# Altium PCB Tigershark 3D R2.2.PcbDoc (part 4 of 4)
Units mil, origin at the board's own origin, x right, y up, seen from the top; angles counter-clockwise.
Board outline 4100 x 4050 mil, 4 copper layers (Top Layer, Groun Plane, Power Plane, Bottom Layer), stack 61.73 mil thick; 359 components, 238 nets, 1141 pads, 830 vias.
Unrouted connection lines stored in the file: 3.
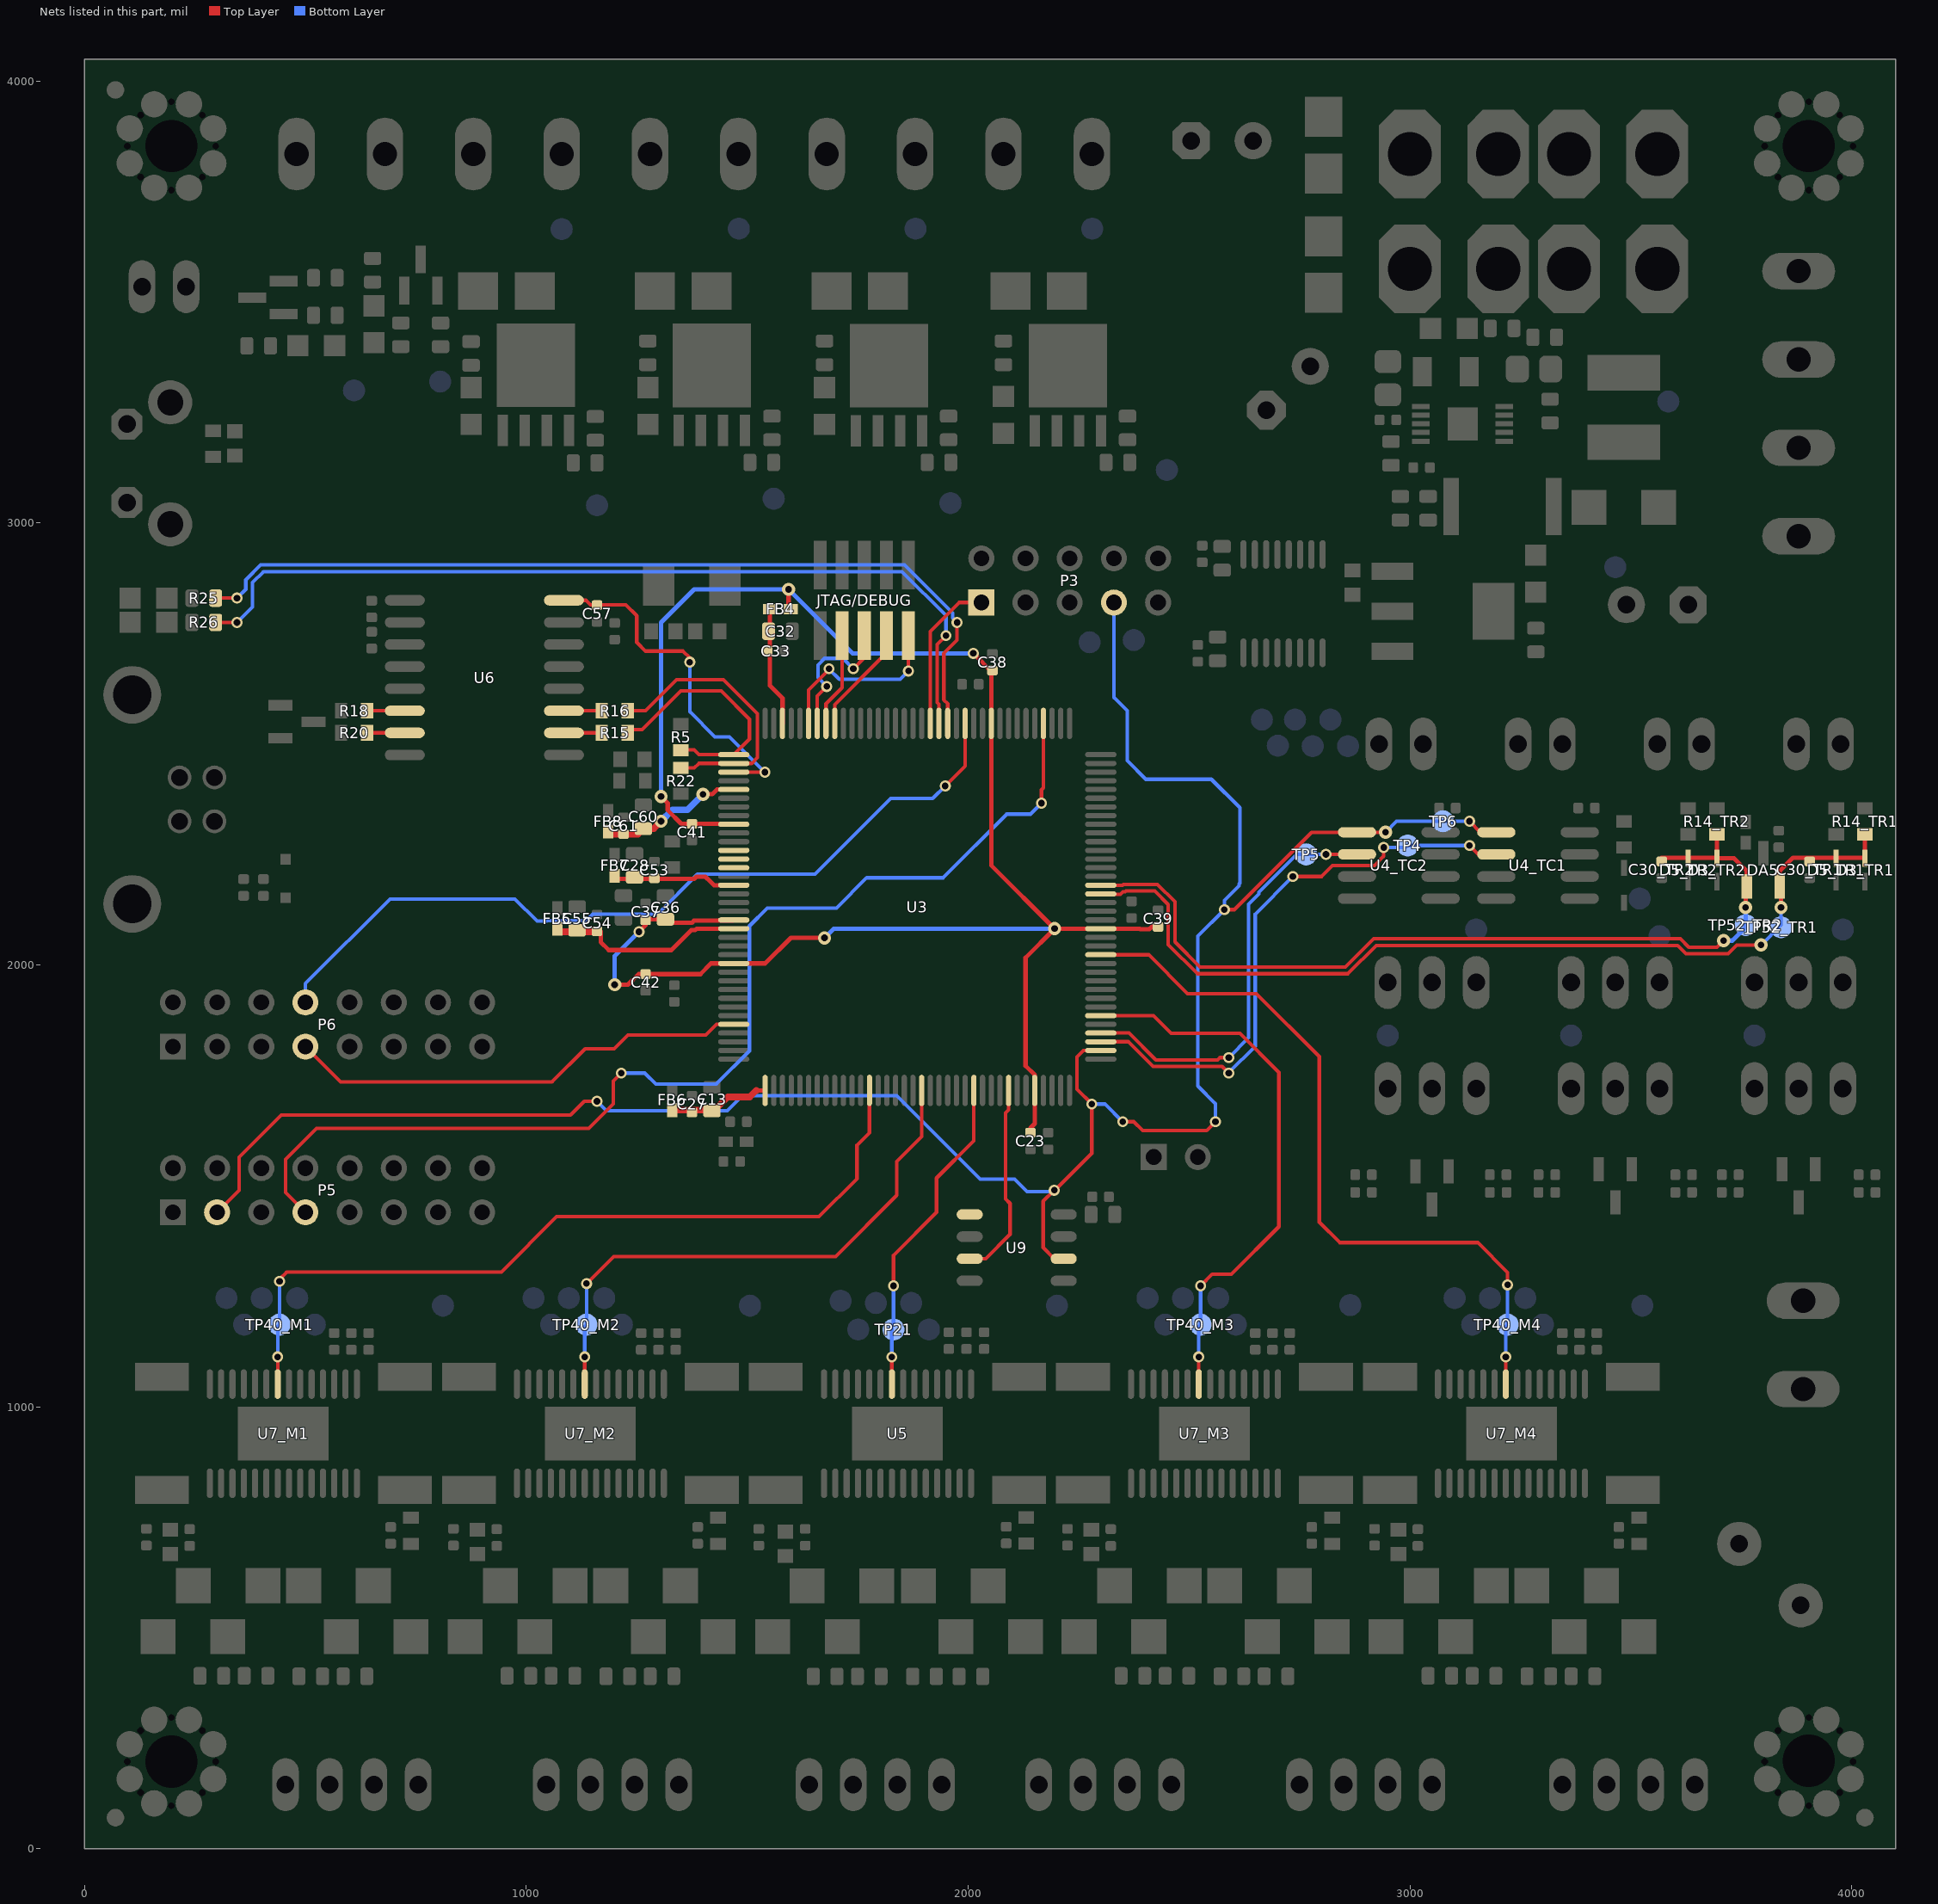
[diagram p6: the nets of this part, all layers, seen from the top]

## Via types
v1: diameter 30, hole 15, Top Layer to Bottom Layer, tented both sides, 528 vias
v2: diameter 25, hole 15, Top Layer to Bottom Layer, tented both sides, 154 vias
v3: diameter 19.68, hole 7.87, Top Layer to Bottom Layer, 75 vias
v4: diameter 25, hole 15, Top Layer to Bottom Layer, 61 vias
v5: diameter 30, hole 15, Top Layer to Bottom Layer, 9 vias
v6: diameter 45, hole 20, Top Layer to Bottom Layer, tented both sides, 2 vias
v7: diameter 25, hole 15, Top Layer to Bottom Layer, tented bottom, 1 vias

## Nets (pads, with @x,y where several pads share a name; then routed paths per layer and width w, separated by ;. In a path a pad name is that pad's centre, name@x,y a point inside that pad or via, vN(x,y) a via of type N, cw(c..) or ccw(c..) an arc to the next point about the centre after c; other vN are vias at no path point) (continued)
SCLK: P3.7 P5.3 TP6.1 U3.110 U4_TC1.5 U4_TC2.5 U9.6 | length 5223.4
  Top Layer w8: P5.3@300,1440 350,1490 350,1565 445,1660 1100,1660 1131.21,1691.21 v2(1160,1691.21) ; U9.6@2216.3,1335 2195,1335 2170,1360 2170,1465 v2(2195,1490) 2196.21,1490 2280,1573.79 v2(2280,1685) 2246.39,1718.61 2246.39,1791.39 2261.3,1806.3 U3.110@2300.35,1806.3 ; v2(2350,1645) 2375,1645 2395,1625 2540,1625 v2(2560,1645) ; v2(2580,2125) 2602.43,2125 2777.43,2300 U4_TC2.5@2880.51,2300 v1(2945,2300) ; v2(3135,2325) 3160,2300 U4_TC1.5@3195.51,2300
  Bottom Layer w8: v2(1160,1691.21) 1181.21,1670 1454.85,1670 1488.85,1704 1838.57,1704 2027.57,1515 2105,1515 2133.5,1486.5 2191.5,1486.5 v2(2195,1490) ; v2(2280,1685) 2310,1685 v2(2350,1645) ; P3.7@2330,2820 2330,2605 2360,2575 2360,2462.43 2402.43,2420 2550.66,2420 2615,2355.66 2615,2184.85 2613.5,2183.35 2613.5,2179.2 2580,2145.7 v2(2580,2125) 2520,2065 2520,1725.81 2560,1685.81 v2(2560,1645) ; v1(2945,2300) 2970,2325 v2(3135,2325)
SHDN: U3.50
SPIFLASH_CS: U9.1
STEP1: TP40_M1.1 U3.85 U7_M1.22 | length 1843.3
  Top Layer w8: U7_M1.22@437.2,1052.2 v2(437.2,1112.64) ; v2(441.26,1283.74) 441.26,1288.69 457.57,1305 943.64,1305 1068.64,1430 1662.43,1430 1748.5,1516.07 1748.5,1591.99 1776.73,1620.22 U3.85@1776.73,1715.75
  Bottom Layer w8: v2@437,1112.84 v2(437.2,1112.64) 437.2,1181.75 TP40_M1.1@441.23,1185.77 v2@441.23,1275.77
STEP2: TP40_M2.1 U3.91 U7_M2.22 | length 1271.1
  Top Layer w8: U7_M2.22@1132.2,1052.2 v2(1132.2,1112.64) ; v2(1136.26,1278.74) 1197.52,1340 1700,1340 1838.5,1478.5 1838.5,1554.71 1894.84,1611.06 U3.91@1894.84,1715.75
  Bottom Layer w8: v2@1132,1112.84 v2(1132.2,1112.64) 1132.2,1181.75 TP40_M2.1@1136.23,1185.77 v2@1136.23,1275.77
STEP3: TP40_M3.1 U3.114 U7_M3.22 | length 1265.3
  Top Layer w8: U3.114@2301.42,1886.1 U3.114@2300.35,1885.04 2419.41,1885.04 2459.45,1845 2615.29,1845 2703.5,1756.79 2703.5,1407.43 2596.07,1300 2552.52,1300 v4(2526.26,1273.74) ; U7_M3.22@2522.2,1052.2 v4(2522.2,1112.64)
  Bottom Layer w8: v4@2522,1112.84 v4(2522.2,1112.64) 2522.2,1181.75 TP40_M3.1@2526.23,1185.77 v4@2526.23,1275.77
STEP4: TP40_M4.1 U3.121 U7_M4.22 | length 1691.9
  Top Layer w8: U3.121@2300.35,2022.83 2408.89,2022.83 2496.73,1935 2652.57,1935 2795,1792.57 2795,1417.57 2841.07,1371.5 3153.5,1371.5 3221.23,1303.77 v4(3221.23,1275.77) ; U7_M4.22@3217.2,1052.2 v4(3217.2,1112.64)
  Bottom Layer w8: v4@3217,1112.84 v4(3217.2,1112.64) 3217.2,1181.75 TP40_M4.1@3221.23,1185.77 v4(3221.23,1275.77)
STEP_EXP1: P6.7 U3.68 | length 1056.8
  Top Layer w8: P6.7@500,1815 580,1735 1058.13,1735 1133.13,1810 1198.79,1810 1229.77,1840.98 1405.98,1840.98 1430.35,1865.35 U3.68@1469.65,1865.35
STEP_EXP2: P6.8 U3.13 | length 1877.7
  Top Layer w8: v2(1948.23,2405) 1993.27,2450.03 U3.13@1993.27,2546.46
  Bottom Layer w8: P6.8@500,1915 500,1957.57 691.43,2149 974.23,2149 1024.23,2099 1045.77,2099 1046.77,2100 1135,2100 1150,2115 1290.27,2115 1291.77,2116.5 1298.78,2116.5 1387.28,2205 1653.64,2205 1825.14,2376.5 1919.73,2376.5 v2(1948.23,2405)
STEP_Z: TP21.1 U3.97 U5.22 | length 740.5
  Top Layer w8: U5.22@1827.24,1052.17 v4(1827.24,1112.61) ; v4(1831.26,1273.74) 1831.26,1342.47 1928.5,1439.71 1928.5,1517.43 2012.95,1601.89 U3.97@2012.95,1715.75
  Bottom Layer w8: v4(1827.24,1112.61) 1827.24,1181.72 1831.26,1185.74 v4(1831.26,1273.74)
TC_CS1: TP4.1 U3.111 U4_TC1.6 | length 1333.4
  Top Layer w8: U3.111@2300.35,1825.98 2362.8,1825.98 2418.79,1770 2575,1770 v2(2590,1755) ; v2(2735,2200) 2800,2200 2825,2225 2920,2225 2940.79,2245.79 v2(2940.79,2265.5) ; v2(3135,2270) 3155,2250 U4_TC1.6@3195.51,2250
  Bottom Layer w8: v2(2590,1755) 2590,1756.21 2650,1816.21 2650,2115 v2(2735,2200) ; v2(2940.79,2265.5) 2990.5,2265.5 TP4.1@2995,2270 v2(3135,2270)
TC_CS2: TP5.1 U3.112 U4_TC2.6 | length 977.6
  Top Layer w8: U3.112@2300.35,1845.67 2364.33,1845.67 2425,1785 2565,1785 2570,1790 v2(2590,1790) ; v2@2811.77,2255 2816.77,2250 U4_TC2.6@2880.51,2250
  Bottom Layer w8: v2(2590,1790) 2635,1835 2635,2137.06 2658.5,2160.56 2658.5,2164.71 2743.79,2250 v2(2810,2250)
TCK/SWDCLK: JTAG/DEBUG.4 U3.28 | length 247.1
  Top Layer w8: U3.28@1697.99,2546.46 1697.99,2589.12 1815,2706.13 JTAG/DEBUG.4@1815,2745.08
TDI: JTAG/DEBUG.8 U3.29 | length 213.8
  Top Layer w8: U3.29@1678.31,2546.46 1678.31,2590.65 1715,2627.34 JTAG/DEBUG.8@1715,2745.08
TDO/SWO: JTAG/DEBUG.6 U3.30 | length 330.4
  Top Layer w8: U3.30@1658.62,2546.46 1658.62,2608.62 v2(1680,2630) ; v2(1740,2670) 1765,2695 JTAG/DEBUG.6@1765,2745.08
  Bottom Layer w8: v2(1680,2630) 1660,2650 1660,2678.23 1675.27,2693.5 1716.5,2693.5 v2(1740,2670)
THERM_AN1: C30_TR1.2 D3_TR1.1 D5_TR1.2 DA5.2 R14_TR1.1 TP52_TR1.1 U3.128 | length 2106.8
  Top Layer w8: U3.128@2300.35,2160.63 2301.35,2159.63 2344.63,2159.63 2350.32,2165.32 2355.64,2165.32 2357.52,2167.2 2422.48,2167.2 2453,2136.68 2453,2045.79 2518.79,1980 2860,1980 2924,2044 3606,2044 3625,2025 3720,2025 3740,2045 v1(3795,2045)
  Top Layer w10: v1(3840,2130) 3840,2175 DA5.2@3837.4,2177.6 3837.4,2212.4 3867.56,2242.56 D3_TR1.1@4029.02,2242.56 ; D3_TR1.1@4030,2241.57 R14_TR1.1@4030,2295.47
  Bottom Layer w8: v1(3795,2045) 3840,2090 v1@3840,2120
THERM_AN2: C30_TR2.2 D3_TR2.1 D5_TR2.2 DA5.1 R14_TR2.1 TP52_TR2.1 U3.129 | length 2020.3
  Top Layer w8: U3.129@2300.35,2180.32 2349.42,2180.32 2351.31,2182.2 2428.69,2182.2 2468,2142.89 2468,2052 2525,1995 2853.79,1995 2917.79,2059 3612.21,2059 3631.21,2040 3695,2040 v1(3710,2055)
  Top Layer w10: C30_TR2.2@3570,2242.56 D3_TR2.1@3694.02,2242.56 ; R14_TR2.1@3695,2295.47 D3_TR2.1@3695,2241.57 3733.43,2241.57 3762.6,2212.4 DA5.1@3762.6,2177.6 3760,2175 v1(3760,2130)
  Bottom Layer w10: v1(3710,2055) 3730,2055 3760,2085 v1@3760,2120
TMS/SWDIO: JTAG/DEBUG.2 U3.31 | length 394.6
  Top Layer w8: U3.31@1638.94,2546.46 1638.94,2622.17 v2@1685.88,2669.12 ; v2(1865,2665) JTAG/DEBUG.2@1865,2720.08
  Bottom Layer w8: v2(1685,2670) 1708.5,2646.5 1846.5,2646.5 v2(1865,2665)
TXD0: P5.7 U3.4 | length 2582.4
  Top Layer w8: P5.7@500,1440 455,1485 455,1560 525,1630 1141.36,1630 1197,1685.64 1197,1737 v2(1215,1755) ; v2(2166.1,2366.1) 2166.1,2396.1 2170.43,2400.43 U3.4@2170.43,2546.46
  Bottom Layer w8: v2(1215,1755) 1268.23,1755 1293.23,1730 1430,1730 1505,1805 1505,2087.98 1545.52,2128.5 1702.14,2128.5 1770.74,2197.1 1943.32,2197.1 2087.32,2341.1 2141.1,2341.1 v2(2166.1,2366.1)
TXD1: P3.1 U3.17 | length 350.7
  Top Layer w8: U3.17@1914.53,2546.46 1914.53,2754.53 1980,2820 P3.1@2030,2820
UD_N: R18.1 U6.6 | length 85.4
  Top Layer w8: R18.1@639.53,2575 U6.6@724.88,2575
UD_P: R20.1 U6.7 | length 85.4
  Top Layer w8: R20.1@639.53,2525 U6.7@724.88,2525
UI_N: R16.2 U6.11 | length 85.4
  Top Layer w8: U6.11@1085.12,2575 1135,2575 R16.2@1170.47,2575
UI_P: R15.2 U6.10 | length 85.4
  Top Layer w8: U6.10@1085.12,2525 1150,2525 R15.2@1170.47,2525
UMCU_N: R16.1 R22.1 U3.38 | length 631.4
  Top Layer w8: R16.1@1229.53,2575 1269.64,2575 1339.64,2645 1441.56,2645 1446.51,2645 1523,2568.51 1523,2468.91 1510,2455.91 U3.38@1469.65,2455.91 1390.28,2455.91 1380,2445.63 R22.1@1355,2445.63
UMCU_P: R5.1 R15.1 U3.37 | length 555.6
  Top Layer w8: R15.1@1229.53,2525 1237.03,2532.5 1262.5,2532.5 1350,2620 1441.1,2620 1505,2556.1 1505,2510.94 U3.37@1469.65,2475.59 1390.98,2475.59 1380,2486.57 R5.1@1355,2486.57
USB_RX: R25.1 U3.15 | length 2026.8
  Top Layer w8: R25.1@296.77,2830 v2(345,2830) ; U3.15@1953.9,2546.46 1953.9,2591.1 1945,2600 1945,2705 1975,2735 v2(1975,2775)
  Bottom Layer w8: v2(345,2830) 365,2850 365,2871.21 398.79,2905 1856.21,2905 1965,2796.21 1965,2785 v2(1975,2775)
USB_TX: R26.1 U3.16 | length 2028.1
  Top Layer w8: R26.1@296.77,2775 v2(345,2775) ; U3.16@1934.21,2546.46 1934.21,2589.57 1930,2593.79 1930,2725 v2(1950,2745)
  Bottom Layer w8: v2(345,2775) 380,2810 380,2865 405,2890 635,2890 1850,2890 1950,2790 v2(1950,2745)
VBUS: C57.2 U3.39 U6.16 | length 793
  Top Layer w8: U6.16@1085.12,2825 1135,2825 1145,2815 1225,2815 1250,2790 1250,2730 1270,2710 1355,2710 1370,2695 v2(1370,2685) ; U3.39@1469.65,2436.22 v2@1540,2436.22
  Bottom Layer w8: v2(1370,2685) 1370,2572.87 1426.77,2516.1 1460,2516.1 v2(1540,2436.1)
VDDANA: C13.2 C27.2 FB6.2 U3.73 | length 228.3
  Top Layer w10: 1520.75,1715.75 U3.73@1539.79,1715.75
  Top Layer w15: FB6.2@1330,1671.1 1426.1,1671.1 1456.1,1701.1 1506.1,1701.1 1520.75,1715.75
VDDBU: C28.2 C53.2 FB7.2 U3.52 | length 282.5
  Top Layer w10: FB7.2@1200,2201.38 1206.88,2194.5 1379.85,2194.5 1384.85,2199.5 1405.15,2199.5 1410.15,2194.5 1410.5,2194.5 1424.68,2180.32 U3.52@1469.65,2180.32
VDDIN: C54.2 C55.2 FB5.2 U3.57 | length 441.4
  Top Layer w8: C54.2@1167.77,2078.23 C54.2@1170,2076
  Top Layer w10: C54.2@1168.37,2075 1168.37,2051.63 1186.5,2033.5 1328.5,2033.5 1373.5,2078.5 1382.19,2078.5 1385.58,2081.89 U3.57@1469.65,2081.89
  Top Layer w15: FB5.2@1070,2081.38 1076.38,2075 C54.2@1153.37,2075
VDDOUT: C23.2 C36.2 C37.2 C38.2 C39.2 C41.2 C42.2 FB4.1 U3.10 U3.45 U3.56 U3.61 U3.104 U3.124 | length 4296.6
  Top Layer w10: v1(1200,1955) 1230,1955 1254,1979 1394,1979 1418.15,2003.15 U3.61@1469.65,2003.15 1540.78,2003.15 1598.73,2061.1 v1(1675,2061.1) ; v2(1255,2075) C37.2@1270,2090 ; C37.2@1270,2098.54 C37.2@1270,2101 1272.23,2103.23 C36.2@1315,2103.23 1322.73,2095.5 1375.15,2095.5 1379.44,2099.8 1467.87,2099.8 U3.56@1469.65,2101.57 ; v1(1305,2381.1) 1320,2366.1 1320,2350 1351,2319 1468.76,2319 U3.45@1469.65,2318.11 ; FB4.1@1593.62,2811.1 v1(1593.62,2849.72) ; v2(2011.58,2705) 2055,2661.58 2052.32,2658.9 U3.10@2052.32,2546.46 2052.32,2225.35 v1(2195.79,2081.89) ; C23.2@2141.1,1620.1 2141.1,1631.1 2150.75,1640.75 U3.104@2150.75,1715.75 2150.75,1750.91 2130,1771.66 2130,2016.1 v1(2195.79,2081.89) ; C39.2@2435,2086 2415.65,2086 2410.15,2080.5 2389.85,2080.5 2388.46,2081.89 U3.124@2300.35,2081.89 v1(2195.79,2081.89)
  Bottom Layer w10: v1(1200,1955) 1200,2020 v2(1255,2075) ; v1(1305,2381.1) 1305,2775 1379.72,2849.72 v1(1593.62,2849.72) 1738.35,2705 v2(2011.58,2705) ; v1(1675,2061.1) 1695.79,2081.89 v1(2195.79,2081.89)
VDDPLL: C32.2 C33.2 FB4.2 U3.34 | length 278.5
  Top Layer w10: FB4.2@1546.38,2811.1 1551.38,2806.1 1551.38,2632.14 1579.88,2603.63 U3.34@1579.88,2546.46
VDDUTMI: C60.2 C61.2 FB8.2 U3.41 | length 328.6
  Top Layer w10: v1(1400,2386.1) 1421.1,2386.1 1431.85,2396.85 U3.41@1469.65,2396.85
  Top Layer w15: FB8.2@1185,2301.38 1190.38,2296 C61.2@1220,2296 1252.77,2296 C60.2@1265,2308.23 1288.23,2308.23 v1(1305,2325)
  Bottom Layer w15: v1(1305,2325) 1331.1,2351.1 1365,2351.1 v1(1400,2386.1)
WP#: U3.101 U9.3 | length 446.7
  Top Layer w8: U9.3@2003.7,1335 2040,1335 2095,1390 2095,1460 2085,1470 2085,1665 2091.69,1671.69 U3.101@2091.69,1715.75
XIN32: U3.48
XOUT32: U3.49
pads on no net: FD1.1 FD2.1 FD3.1 H1.0 H2.0 H3.0 H4.0 JTAG/DEBUG.7 U3.1 U3.2 U3.5 U3.6 U3.7 U3.8 U3.32 U3.127 U3.134 U3.135 U3.138 U3.140 U3.141 U3.142 U3.143 U4_TC1.8 U4_TC2.8 U5.18 U5.19 U5.23 U5.27 U7_M1.18 U7_M1.19 U7_M1.23 U7_M1.27 U7_M2.18 U7_M2.19 U7_M2.23 U7_M2.27 U7_M3.18 U7_M3.19 U7_M3.23 U7_M3.27 U7_M4.18 U7_M4.19 U7_M4.23 U7_M4.27

## Polygon pours and split planes (outlines as drawn)
GND on Top Layer "Mechanical 15-No Net" (solid, remove dead copper, pour order 56): 2885,1375 2885,855 3025,855 3025,875 3185,875 3390,875 3390,785 3405,770 3465,710 3495,710 3495,775 3440,775 3440,850 3575,850 3575,1375 3325,1375 3325,1150 3440,1150 3440,1005 3265,1005 3080,1005 3080,1040 3080,1375
GND on Top Layer "Mechanical 15-No Net" (solid, remove dead copper, pour order 56): 2190,1375 2190,855 2330,855 2330,875 2490,875 2695,875 2695,785 2710,770 2770,710 2800,710 2800,775 2745,775 2745,850 2880,850 2880,1375 2630,1375 2630,1150 2745,1150 2745,1005 2570,1005 2385,1005 2385,1040 2385,1375
GND on Top Layer "Mechanical 15-No Net" (solid, remove dead copper, pour order 56): 1495.26,1375 1495.26,855 1635.26,855 1635.26,875 1795.26,875 2000.26,875 2000.26,785 2015.26,770 2075.26,710 2105.26,710 2105.26,775 2050.26,775 2050.26,850 2185.26,850 2185.26,1375 1935.26,1375 1935.26,1150 2050.26,1150 2050.26,1005 1875.26,1005 1690.26,1005 1690.26,1040 1690.26,1375
GND on Top Layer "Mechanical 15-No Net" (solid, remove dead copper, pour order 56): 800,1375 800,855 940,855 940,875 1100,875 1305,875 1305,785 1320,770 1380,710 1410,710 1410,775 1355,775 1355,850 1490,850 1490,1375 1240,1375 1240,1150 1355,1150 1355,1005 1180,1005 995,1005 995,1040 995,1375
GND on Top Layer "Mechanical 15-No Net" (solid, remove dead copper, pour order 56): 105,1375 105,855 245,855 245,875 405,875 610,875 610,785 625,770 685,710 715,710 715,775 660,775 660,850 795,850 795,1375 545,1375 545,1150 660,1150 660,1005 485,1005 300,1005 300,1040 300,1375
GND on Top Layer "Top Layer-No Net" (solid, remove dead copper, pour order 62): 3805,1090 3805,925 3830,925 3830,905 3830,810 3830,350 4080,350 4080,1090
+12VCC1 on Top Layer "Top Layer-No Net" (solid, remove dead copper, pour order 54): 4080,1365 3585,1365 3585,350 3810,350 3815,350 3820,350 3820,915 3795,915 3795,1100 4080,1100
NetD18_C on Top Layer "Mechanical 15-No Net" (solid, remove dead copper, pour order 65): 2055,3175 2125,3175 2125,3255 2130,3260 2235,3260 2620,3260 2620,4025 2155,4025 2155,3475 2125,3475 2125,3395 2125,3285 2110,3285 2110,3255 2055,3255
GND on Top Layer "Mechanical 15-No Net" (solid, remove dead copper, pour order 67): 1994.5,3164.19 1994.5,3064.19 1999.5,3059.19 2309.5,3059.19 2309.5,3124.19 2269.5,3124.19 2269.5,3249.19 2129.5,3249.19 2129.5,3164.19
GND on Top Layer "Mechanical 15-No Net" (solid, remove dead copper, pour order 68): 1589.5,3164.19 1589.5,3064.19 1594.5,3059.19 1904.5,3059.19 1904.5,3124.19 1864.5,3124.19 1864.5,3249.19 1724.5,3249.19 1724.5,3164.19
GND on Top Layer "Mechanical 15-No Net" (solid, remove dead copper, pour order 69): 1188.5,3164.61 1188.5,3064.61 1193.5,3059.61 1503.5,3059.61 1503.5,3124.61 1463.5,3124.61 1463.5,3249.61 1323.5,3249.61 1323.5,3164.61
GND on Top Layer "Mechanical 15-No Net" (solid, remove dead copper, pour order 70): 790,3165 790,3065 795,3060 1105,3060 1105,3125 1065,3125 1065,3250 925,3250 925,3165
GND on Top Layer "SMPS" (solid, pour order 66): 3242,3173 3214,3145 3126,3145 3076,3095 3076,2972 3201,2972 3250,3021 3252,3023 3252,3156 3252,3173
NetC40_2 on Top Layer "SMPS" (solid, pour order 55): 3256,3239 3278.77,3216.23 3323,3216.23 3429.23,3110 3445,3110 3461,3094 3461,3018 3499,2980 3585,2980 3603,2998 3603,3080 3603,3193 3557,3239 3546,3250 3274,3250 3259,3250 3256,3247
NetD2_A on Top Layer "SMPS" (solid, pour order 53): 3259,3206 3259,3070 3259,3021 3308,2972 3421,2972 3445,2996 3445,3085 3433,3097 3416,3097 3335,3178 3308,3205 3262,3205
NetF2_1 on Top Layer "Mechanical 15-No Net" (solid, remove dead copper, pour order 72): 4075,3450 3730,3450 3730,3695 3725,3700 3350,3700 3280,3700 3280,4025 4075,4025
NetF1_1 on Top Layer "Mechanical 15-No Net" (solid, remove dead copper, pour order 73): 3730,3085 4075,3085 4075,3310 4075,3435 4065,3435 4065,3300 4065,3435 3865,3435 3865,3300 3865,3435 3785,3435 3785,3300 3785,3435 3730,3435 3715,3435 3715,3690 3280,3690 3280,3455 3285,3450 3395,3450 3395,3400 3555,3400 3605,3400 3610,3395 3610,3085
+12VCC2 on Top Layer "Mechanical 15-No Net" (solid, remove dead copper, pour order 74): 3275,3470 3275,3685 3280,3690 2880,3690 2880,3595 2740,3595 2740,3470 2740,3400 2725,3385 2725,3325 2725,3155 2730,3150 2875,3150 2875,3425 3015,3425 3015,3475 3265,3475
+12VCC3 on Top Layer "Mechanical 15-No Net" (solid, remove dead copper, pour order 75): 3270,3700 3270,4025 2630,4025 2630,3915 2630,3810 2750,3810 2750,3855 2755,3850 2865,3850 2865,3735 2930,3735 2865,3735 2865,3700 2965,3700
3.3VCC on Top Layer "Mechanical 15-No Net" (solid, remove dead copper, pour order 77): 2900,2750 2900,2655 3540,2655 3540,2875 3320,2875 3315,2870 3315,2735 3315,2725 3120,2725 3120,2750
+5VCC on Top Layer "Mechanical 15-No Net" (solid, remove dead copper, pour order 78): 2840,3010 2840,2870 3015,2870 3015,2920 2935,2920 2935,3010
+12VCC2 on Top Layer "Mechanical 15-No Net" (solid, remove dead copper, pour order 63): 1600,4025 1600,3400 1720,3400 1720,3480 1745,3480 1745,4025
+12VCC2 on Top Layer "Mechanical 15-No Net" (solid, remove dead copper, pour order 61): 1200,4025 1200,3400 1320,3400 1320,3480 1345,3480 1345,4025
NetD16_C on Top Layer "Mechanical 15-No Net" (solid, remove dead copper, pour order 81): 1645,3280 1645,3195 1720,3195 1720,3255 1780,3255 1920,3255 1920,3265 1995,3265 1995,4030 1750,4030 1750,3475 1725,3475 1725,3395 1725,3335 1705,3335 1705,3280
NetD14_C on Top Layer "Mechanical 15-No Net" (solid, remove dead copper, pour order 80): 1245,3280 1245,3195 1320,3195 1320,3255 1380,3255 1520,3255 1520,3265 1595,3265 1595,4030 1350,4030 1350,3475 1325,3475 1325,3395 1325,3335 1305,3335 1305,3280
NetD12_1 on Top Layer "Mechanical 15-No Net" (solid, remove dead copper, pour order 79): 845,3280 845,3195 920,3195 920,3255 980,3255 1120,3255 1120,3265 1195,3265 1195,4030 950,4030 950,3475 925,3475 925,3395 925,3335 905,3335 905,3280
GND on Top Layer "Mechanical 15-No Net" (solid, remove dead copper, pour order 82): 2740,3605 2875,3605 2875,3685 2880,3690 2860,3690 2860,3845 2855,3840 2760,3840 2760,3810 2760,3805 2625,3805 2625,3255 2390,3255 2390,3150 2680,3150 2720,3150 2720,3380 2720,3605
GND on Top Layer "Mechanical 15-No Net" (solid, remove dead copper, pour order 83): 2840,2860 2840,2655 2845,2650 2895,2650 2895,2755 2980,2755 3125,2755 3125,2730 3250,2730 3250,2875 3250,2880 3255,2875 3320,2875 3325,2880 3330,2880 3545,2880 3545,2660 4080,2660 4080,3080 3745,3080 3740,3075 3610,3075 3610,2975 3595,2960 3270,2960 3065,2960 3030,2925 3025,2920 3025,2860
+12VCC2 on Top Layer "Mechanical 15-No Net" (solid, remove dead copper, pour order 84): 825,4030 825,3685 840,3685 840,3480 855,3480 855,3395 915,3395 915,3480 945,3480 945,3760 945,4030
GND on Top Layer "Mechanical 15-No Net" (solid, remove dead copper, pour order 85): 790,3435 830,3435 830,3675 820,3675 820,3775 725,3775 725,3695 785,3635 785,3630 785,3435
GND on Top Layer "Mechanical 15-No Net" (solid, remove dead copper, pour order 86): 545,3530 545,3580 600,3580 600,3625 332.07,3625 330,3625 330,3620 330,3575 370,3535 375,3530 490,3530
+12VCC3 on Top Layer "Mechanical 15-No Net" (solid, remove dead copper, pour order 64): 2000,4025 2000,3400 2120,3400 2120,3480 2145,3480 2145,4025
GND on Bottom Layer "Mechanical 15-No Net" (solid, remove dead copper, pour order 48): 2886.31,1375 3025,1375 3575,1375 3575,1225 3575,700 3540,700 2885,700 2885,1360 2885,1375
GND on Bottom Layer "Mechanical 15-No Net" (solid, remove dead copper, pour order 48): 2191.31,1375 2330,1375 2880,1375 2880,1225 2880,700 2845,700 2190,700 2190,1360 2190,1375
GND on Bottom Layer "Mechanical 15-No Net" (solid, remove dead copper, pour order 48): 1496.57,1375 1635.26,1375 2185.26,1375 2185.26,1225 2185.26,700 2150.26,700 1495.26,700 1495.26,1360 1495.26,1375
GND on Bottom Layer "Mechanical 15-No Net" (solid, remove dead copper, pour order 48): 801.31,1375 940,1375 1490,1375 1490,1225 1490,700 1455,700 800,700 800,1360 800,1375
GND on Bottom Layer "Mechanical 15-No Net" (solid, remove dead copper, pour order 48): 106.31,1375 245,1375 795,1375 795,1225 795,700 760,700 105,700 105,1360 105,1375
+12VCC1 on Bottom Layer "Mechanical 15-No Net" (solid, remove dead copper, pour order 52): 4080,1360 3585,1360 3585,690 3560,690 20,690 20,325 195,325 200,330 375,330 4080,330
+12VCC3 on Bottom Layer "Mechanical 15-No Net" (solid, remove dead copper, pour order 76): 3270,3700 3270,3955 2000,3955 2000,3700 2000,3600 2390,3600 2390,3700
NetF2_1 on Bottom Layer "Mechanical 15-No Net" (solid, remove dead copper, pour order 71): 4075,3450 3730,3450 3730,3695 3725,3700 3350,3700 3280,3700 3280,4025 4075,4025
NetF1_1 on Bottom Layer "Mechanical 15-No Net" (solid, remove dead copper, pour order 87): 3280,3480 3280,3495 3280,3680 3290,3690 3310,3690 3715,3690 3715,3675 3715,3435 3785,3435 3785,3300 3785,3435 4080,3435 4080,3300 4080,3085 3940,3085 3610,3085 3610,3395 3605,3400 3395,3400 3395,3465 3360,3465 3280,3465
NetD16_C on Bottom Layer "Mechanical 15-No Net" (solid, remove dead copper, pour order 90): 1725,3335 1725,3475 1750,3475 1750,3525 1750,4030 1825,4030 1995,4030 1995,3950 1990,3945 1995,3940 1995,3265 1725,3265
NetD14_C on Bottom Layer "Mechanical 15-No Net" (solid, remove dead copper, pour order 89): 1325,3335 1325,3475 1350,3475 1350,3525 1350,4030 1425,4030 1595,4030 1595,3950 1590,3945 1595,3940 1595,3265 1325,3265
NetD12_1 on Bottom Layer "Mechanical 15-No Net" (solid, remove dead copper, pour order 88): 925,3335 925,3475 950,3475 950,3525 950,4030 1025,4030 1195,4030 1195,3950 1190,3945 1195,3940 1195,3265 925,3265
+12VCC2 on Bottom Layer "Mechanical 15-No Net" (solid, remove dead copper, pour order 91): 355,4015 355,3685 20,3685 20,3395 770,3395 780,3385 780,3030 2870,3030 2870,3470 2870,3480 2970,3480 3270,3480 3275,3485 3275,3690 2405,3690 2405,3590 2005,3590 2005,3255 1970,3255 1715,3255 1715,3485 1745,3485 1745,4025 1740,4030 1600,4030 1600,3255 1315,3255 1315,3480 1345,3480 1345,4030 1200,4030 1200,3255 920,3255 920,3480 945,3480 945,4030 355,4030
GND on Bottom Layer "Mechanical 15-No Net" (solid, remove dead copper, pour order 92): 4100,2660 4100,3075 3950,3075 3605,3075 3600,3080 3600,3385 3590,3395 3550,3395 3385,3395 3385,3445 3385,3455 3270,3455 3270,3475 3170,3475 2880,3475 2880,3030 2880,3025 2840,3025 2845,3020 2845,2660
INPUT_GND on Groun Plane (split plane): 899.9,2435.1 530,2435.1 528.05,2434.71 526.4,2433.6 511.4,2418.6 510.29,2416.95 509.9,2415 509.9,2142.11 437.89,2070.1 220,2070.1 218.05,2069.71 216.4,2068.6 202.89,2055.1 20.1,2055.1 20.1,2699.9 385,2699.9 386.95,2700.29 388.6,2701.4 404.85,2717.65 405.96,2719.3 406.35,2721.25 406.35,2851.25 406.35,2854.14 417.11,2864.9 899.9,2864.9
GND on Groun Plane (split plane): 4079.9,20.1 20.1,20.1 20.1,2044.9 205,2044.9 206.95,2045.29 208.6,2046.4 222.11,2059.9 440,2059.9 441.95,2060.29 443.6,2061.4 518.6,2136.4 519.71,2138.05 520.1,2140 520.1,2412.89 532.11,2424.9 905,2424.9 906.95,2425.29 908.6,2426.4 909.71,2428.05 910.1,2430 910.1,2870 909.71,2871.95 908.6,2873.6 906.95,2874.71 905,2875.1 415,2875.1 413.05,2874.71 411.4,2873.6 397.65,2859.85 396.54,2858.2 396.15,2856.25 396.15,2851.25 396.15,2723.36 382.89,2710.1 20.1,2710.1 20.1,4029.9 4079.9,4029.9
NetF2_1 on Power Plane (split plane): 4079.9,3440.1 3720.1,3440.1 3720.1,3695 3719.71,3696.95 3718.6,3698.6 3716.95,3699.71 3715,3700.1 3280.1,3700.1 3280.1,4029.9 4079.9,4029.9
+12VCC3 on Power Plane (split plane): 3269.9,3700.1 2010.1,3700.1 2010.1,4029.9 3269.9,4029.9
NetF1_1 on Power Plane (split plane): 3709.9,3435 3710.29,3433.05 3711.4,3431.4 3713.05,3430.29 3715,3429.9 4079.9,3429.9 4079.9,2875.1 3580.1,2875.1 3580.1,3305 3579.71,3306.95 3578.6,3308.6 3576.95,3309.71 3575,3310.1 3280.1,3310.1 3280.1,3455 3280.1,3689.9 3709.9,3689.9
+5VCC on Power Plane (split plane): 3569.9,2875.1 2837.11,2875.1 2835.1,2877.11 2835.1,3097.89 3037.11,3299.9 3569.9,3299.9
3.3VCC on Power Plane (split plane): 774.9,3025 775.29,3023.05 776.4,3021.4 778.05,3020.29 780,3019.9 2824.9,3019.9 2824.9,2875 2825.29,2873.05 2826.4,2871.4 2831.4,2866.4 2833.05,2865.29 2835,2864.9 4079.9,2864.9 4079.9,1380.1 3510,1380.1 3508.05,1379.71 3506.4,1378.6 3505.29,1376.95 3504.9,1375 3504.9,945.1 20.1,945.1 20.1,3394.9 774.9,3394.9
+12VCC2 on Power Plane (split plane): 1999.9,3695 2000.29,3693.05 2001.4,3691.4 2003.05,3690.29 2005,3689.9 3269.9,3689.9 3269.9,3455 3269.9,3310.1 3035,3310.1 3033.05,3309.71 3031.4,3308.6 2826.4,3103.6 2825.29,3101.95 2824.9,3100 2824.9,3030.1 785.1,3030.1 785.1,3400 784.71,3401.95 783.6,3403.6 781.95,3404.71 780,3405.1 20.1,3405.1 20.1,4029.9 1999.9,4029.9
+12VCC1 on Power Plane (split plane): 4079.9,20.1 20.1,20.1 20.1,934.9 3510,934.9 3511.95,935.29 3513.6,936.4 3514.71,938.05 3515.1,940 3515.1,1369.9 4079.9,1369.9

## Keep-outs
Keep-Out Layer:
  lines w10: 20,20 4080,20 4080,4030 20,4030 20,20

## Other copper
Groun Plane (plane layer: these items are gaps in the copper):
  lines w10: 0,2050 205,2050 220,2065 303.75,2065 440,2065 515,2140 515,2415 530,2430 700,2430 905,2430 905,2870 525,2870 415,2870 401.25,2856.25 401.25,2851.25 401.25,2721.25 385,2705 0,2705
Power Plane (plane layer: these items are gaps in the copper):
  lines w10: 0,0 1.05,940 3510,940 3510,1375 4095,1375 4095,1290 ; 0,3400 770,3400 780,3400 780,3025 2680,3025 2830,3025 ; 2005,4055 2005,3695 2875,3695 3220,3695 3715,3695 3715,3435 4100,3435 ; 2965,2870 2835,2870 ; 3275,3305 3275,3455 3275,3695 3275,4050 ; 3575,2870 3575,3305 3035,3305 2830,3100 2830,2875 2835,2870 ; 4100,2870 3310,2870 2835,2870

## Silkscreen, mask and mechanical layers (free items; w line width, h text height)
Top Overlay:
  lines w10: 3650,3170 3680,3170 3720,3170 ; 3685,2930 3685,3000 ; 3685,3135 3685,3205 ; 3700,3745 3730,3745 3770,3745 ; 3735,3710 3735,3780
  lines w15: 3665,1235 3695,1235 3735,1235 ; 3700,995 3700,1065 ; 3700,1200 3700,1270
  text "HEATBED" at 3410,3940 h75
  text "FAN-0" at 25,3690 h65
  text "MOSFETs" at 3415,3680 h75
  text "FAN-1" at 355,3625 h90
  text "HEAT-0" at 925,3620 h100
  text "HEAT-1" at 1330,3620 h100
  text "HEAT-2" at 1725,3620 h100
  text "HEATBED" at 2110,3620 h100
  text "SERIAL EXP" at 1975,2984 h90
  text "TR0" at 3675,2665 h25
  text "TC-0" at 2835,2660 h25
  text "TC1" at 3330,2660 h25
  text "TR1" at 3975,2660 h25
  text "b" at 605,2070 h200
  text "MAX" at 2840,1850 h120 r90
  text "MIN" at 2840,1620 h120 r90
  text "ERASE" at 2405,1465 h75
  text "Y" at 3370,1375 h150
  text "Z" at 3790,1375 h150
  text "X" at 2955,1370 h150
  text "MTR PWR 24V" at 3640,845 h100 r90
  text "AVR" at 105,320 h100 r90
  text "X" at 355,270 h150
  text "Y" at 960,270 h150
  text "E1" at 2605,270 h150
  text "E0" at 3200,270 h150
  text "Z" at 1550,265 h150
Bottom Overlay:
  drawing of 5 lines, arcs and shapes, not listed
  text "G" at 11640.52,4072.26 h310
  text "SPI MOSI" at 2260,3310 h90 r90
  text "SPI MISO" at 2360,3295 h90 r90
  text "I2C SDA" at 2155,3265 h90 r90
  text "3V3 DC" at 2455,3215 h90 r90
  text "RX" at 2055,3090 h90 r90
  text "GND" at 2455,2775 h90 r90
  text "TX" at 2055,2765 h90 r90
  text "I2C SCL" at 2155,2765 h90 r90
  text "SPI SCLK" at 2355,2765 h90 r90
  text "SPI CS EXP1" at 2260,2760 h90 r90
  text "GND" at 2970,2075 h90 r180
  text "GND" at 3390,2075 h90 r180
  text "Z-MIN" at 4070,2070 h90 r90
  text "Y-MIN" at 3655,2060 h90 r90
  text "X-MIN" at 3240,2055 h90 r90
  text "3V3" at 3325,2030 h90 r90
  text "3V3" at 2910,2025 h90 r90
  text "3V3" at 3735,2025 h90 r90
  text "GND" at 3895,2000 h90 r270
  text "Y-MAX" at 3325,1835 h90 r90
  text "X-MAX" at 2915,1830 h90 r90
  text "Z-MAX" at 3740,1830 h90 r90
  text "3V3" at 3240,1780 h90 r90
  text "3V3" at 4070,1780 h90 r90
  text "3V3" at 3665,1775 h90 r90
  text "GND" at 3395,1655 h90 r180
  text "GND" at 2980,1650 h90 r180
  text "GND" at 3810,1650 h90 r180
  text "Tigershark 3D" at 3605,1225 h250
  text "Based On the Work of Ultimachine," at 3625,1100 h135
  text "Arduino, RepRap, and Synthetos.com" at 3625,1010 h135
  text "Developed by Adam Vadala-Roth in" at 3625,920 h135
  text "collaboration with Johnny Russell," at 3625,830 h135
  text "b" at 1675,755 h245
  text "Alden S. Hart, and Rob Giseburt" at 3625,745 h135
  text "TinyG2 Powered" at 1480,565 h120
  text "#YOLO-SWAG" at 2630,545 h200
  text "AVR" at 2945,485 h200
  text "Made by Ultimachine in Tennessee USA" at 2625,445 h150
  text "S" at 3355,425 h2000
  text "S" at 3665,420 h175
  text "X-A1" at 430,210 h90 r270
  text "X-A2" at 530,210 h90 r270
  text "Y-A1" at 1020,210 h90 r270
  text "Y-A2" at 1120,210 h90 r270
  text "Z-A1" at 1615,210 h90 r270
  text "Z-A2" at 1715,210 h90 r270
  text "Z-A1" at 2135,210 h90 r270
  text "Z-A2" at 2235,210 h90 r270
  text "E0-A1" at 2725,210 h90 r270
  text "E0-A2" at 2825,210 h90 r270
  text "E1-A1" at 3320,210 h90 r270
  text "E1-A2" at 3420,210 h90 r270
  text "X-B1" at 630,205 h90 r270
  text "X-B2" at 730,205 h90 r270
  text "Y-B1" at 1220,205 h90 r270
  text "Y-B2" at 1320,205 h90 r270
  text "Z-B1" at 1815,205 h90 r270
  text "Z-B2" at 1915,205 h90 r270
  text "Z-B1" at 2335,205 h90 r270
  text "Z-B2" at 2435,205 h90 r270
  text "E0-B1" at 2925,205 h90 r270
  text "E0-B2" at 3025,205 h90 r270
  text "E1-B1" at 3520,205 h90 r270
  text "E1-B2" at 3620,205 h90 r270
  text "Released as Open Source Hardware Under the CERN Open Hardware Liscense" at 4025,35 h125
Mechanical 15:
  the board outline again, w10

## Dimensions
0,4050 to 4100,4050 on Mechanical 1
0,4050 to 0,0 on Mechanical 1

## Text inside footprints (layer, text, board x,y; h text height)
C7: Top Overlay "+" at 3645.18,745.27 h77.5 r315; Top Overlay "+" at 3583.94,806.52 h77.5 r315
FAN-1: Mechanical 16 "1" at 292.5,3597.5 h62 r180
"Heat Power": Top Overlay "4" at 3795,3070 h77.5 r270; Top Overlay "3" at 3795,3270 h77.5 r270; Top Overlay "2" at 3795,3470 h77.5 r270; Top Overlay "1" at 3795,3655 h77.5 r270
MAX1_ES1: Mechanical 16 "1" at 2887.5,1657.5 h62
MAX1_ES2: Mechanical 16 "1" at 3717.5,1657.5 h62
MAX1_ES3: Mechanical 16 "1" at 3302.5,1657.5 h62
MIN1_ES1: Mechanical 16 "1" at 3212.5,2022.5 h62 r180
MIN1_ES2: Mechanical 16 "1" at 4042.5,2022.5 h62 r180
MIN1_ES3: Mechanical 16 "1" at 3627.5,2022.5 h62 r180
"Motor Power": Top Overlay "2" at 3805,1140 h77.5 r270; Top Overlay "1" at 3805,1325 h77.5 r270
P2_TR1: Mechanical 16 "1" at 4037.5,2562.5 h62 r180
P2_TR2: Mechanical 16 "1" at 3722.5,2562.5 h62 r180
T1: Top Overlay "1" at 395,3750 h77.5; Top Overlay "2" at 580,3750 h77.5; Top Overlay "3" at 780,3750 h77.5; Top Overlay "4" at 980,3750 h77.5
T2_TC1: Mechanical 16 "1" at 3407.5,2562.5 h62 r180
T2_TC2: Mechanical 16 "1" at 3092.5,2562.5 h62 r180
U3: Top Overlay "TQFP 144" at 1778.05,2228.46 h49.6 r270; Top Overlay "R" at 1833.56,1983.83 h37.2 r270